# Altium PCB EXP_V121.PcbDoc (part 2 of 4)
Units mm, origin at the board's own origin, x right, y up, seen from the top; angles counter-clockwise.
Board outline 86 x 86 mm, 4 copper layers (Top Layer, Mid-Layer 1, Mid-Layer 2, Bottom Layer), stack 1.584 mm thick; 360 components, 295 nets, 1231 pads, 1192 vias.
Unrouted connection lines stored in the file: 255.
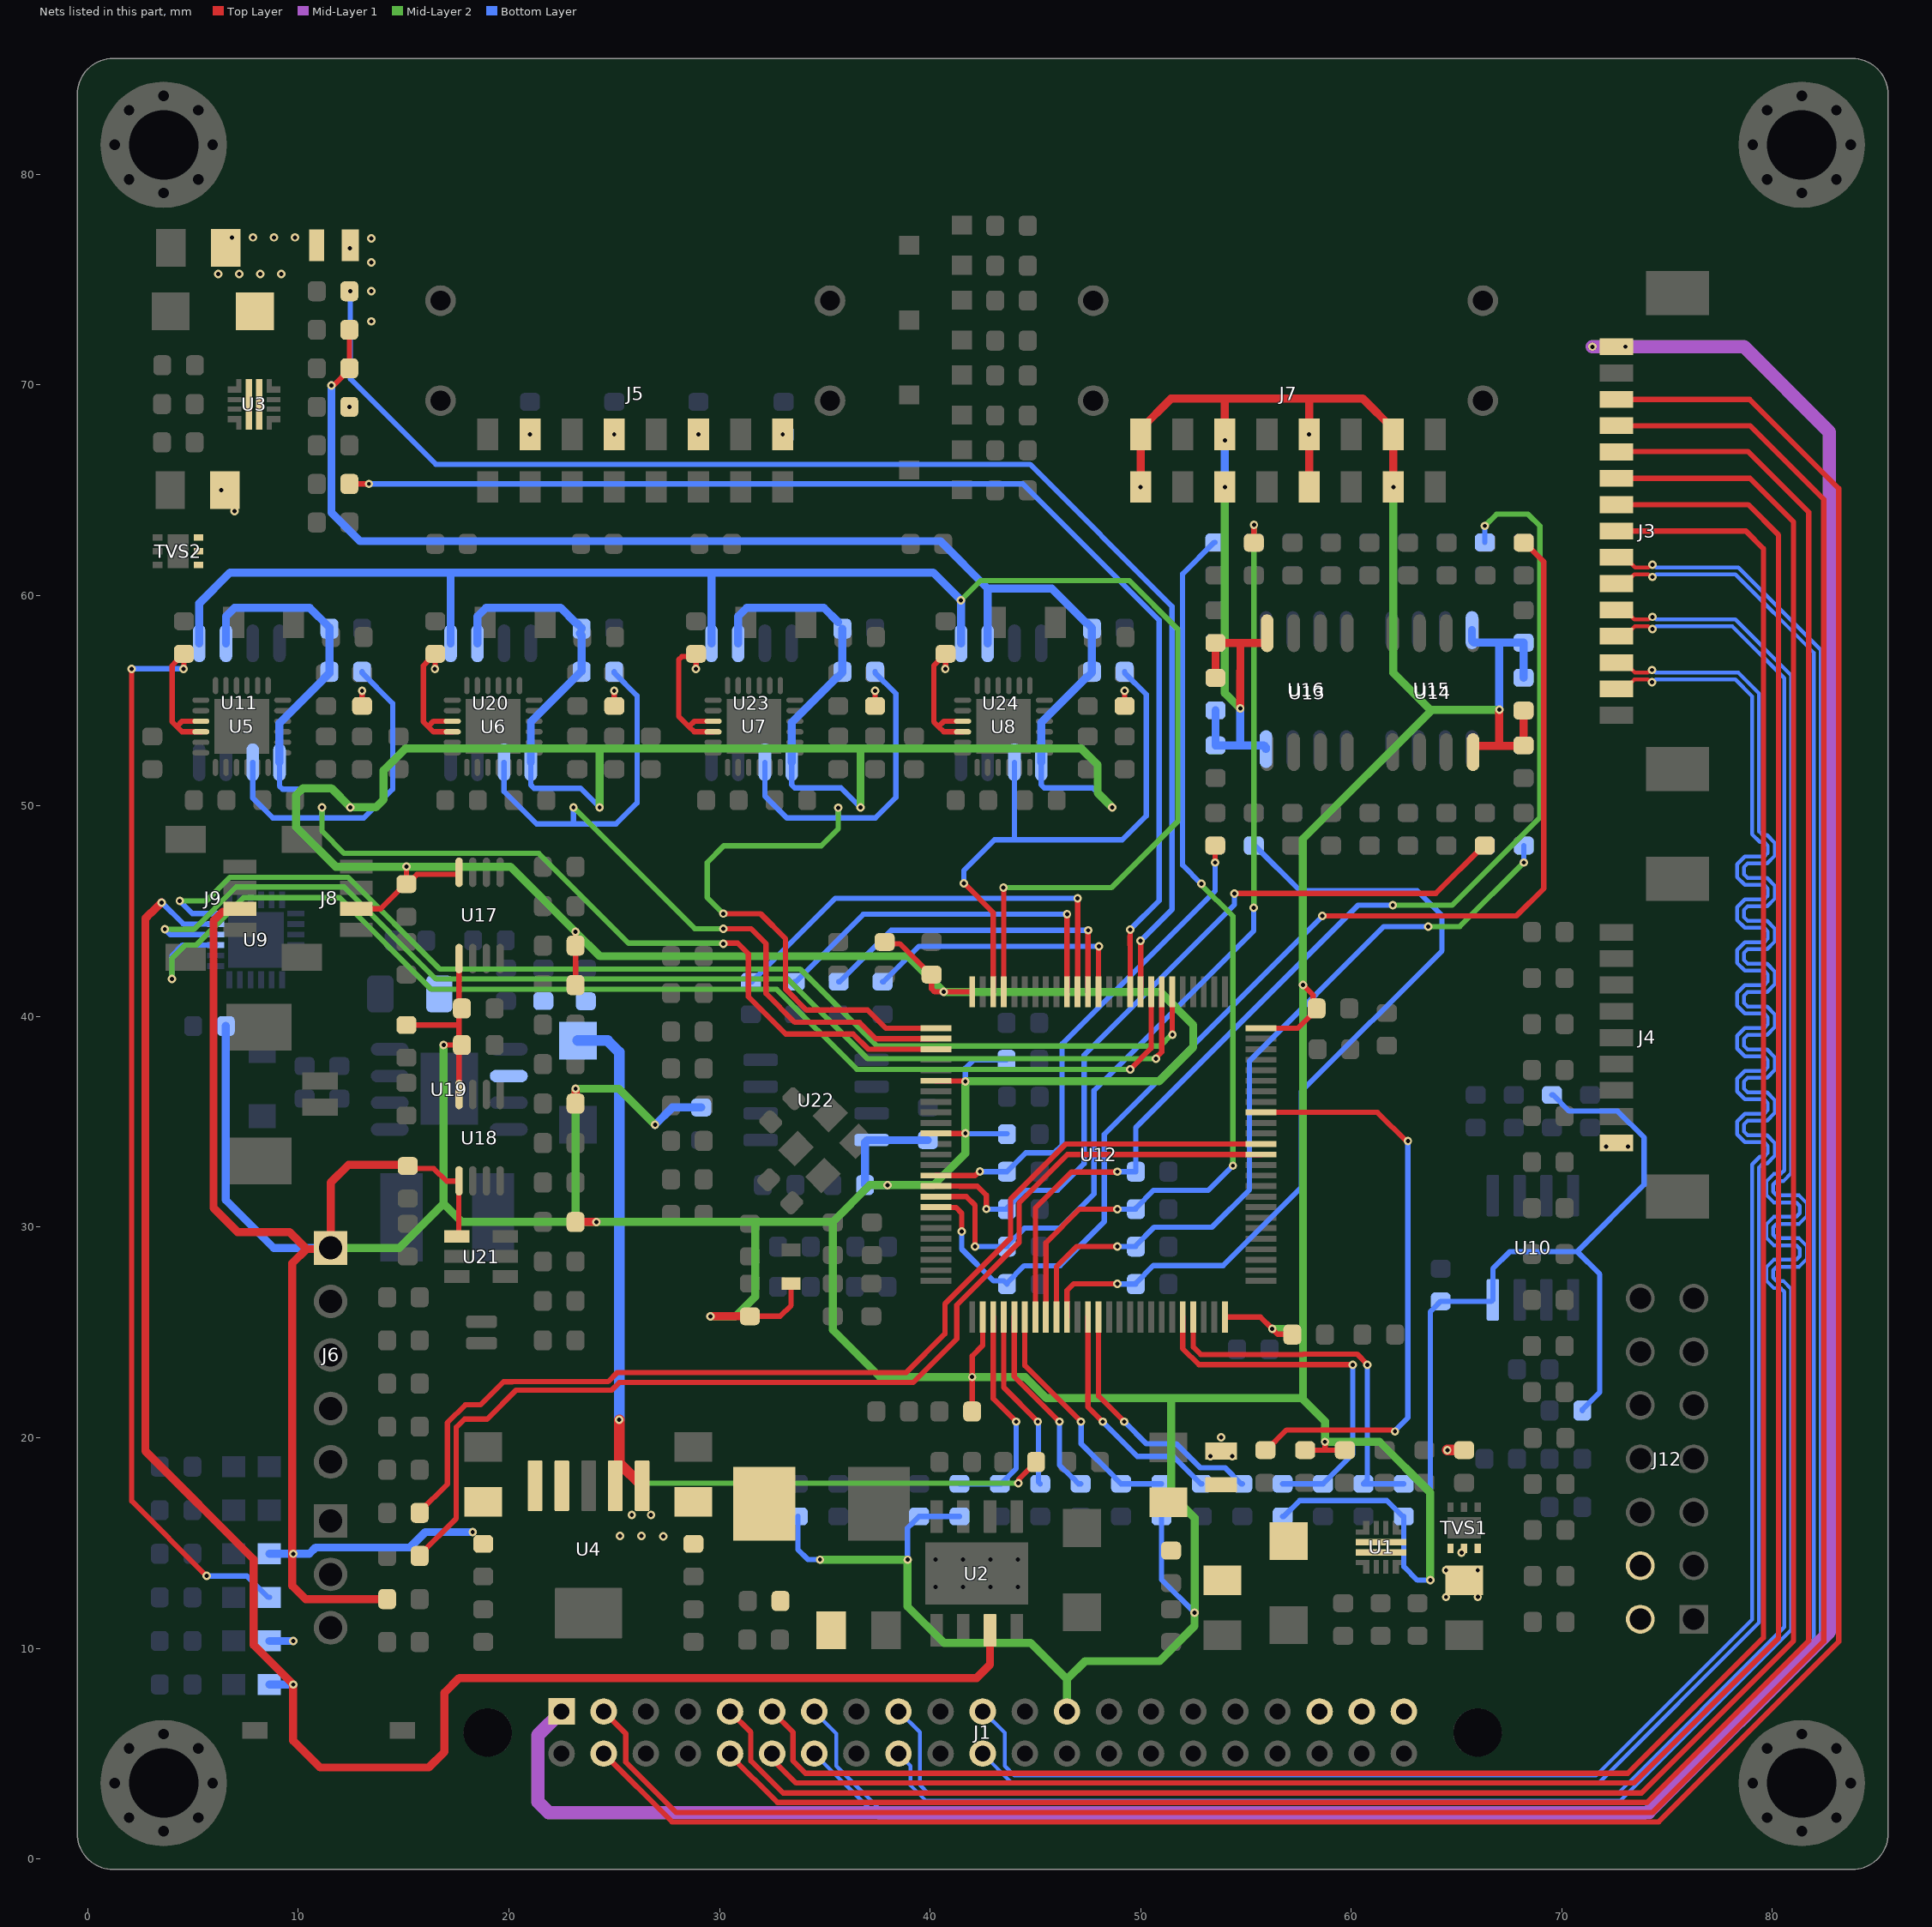
[diagram p4: the nets of this part, all layers, seen from the top]

## Part data
BT1: library part SW2, "Switch button 2 pin"
C1 C2 C8 C9 C12 C13 C17 C18: library part "Cap_Tantalum SMD", "SMD", Chung_Loai=Dán, Don_Vi=Con, Ma_Hang=MH001956, So_Chan=2, Ten_Linh_Kien="Tụ tantalum 477A-470uF 10V SMD7343"
C3 C4 C5 C6 C7 C10 C11 C14 C15 C16 C19 C20 C21 C22 C23 C24 C25 C26 C27 C28 C29 C30 C31 C32 C33 C34 C35 C36 C37 C38 C39 C40 C41 C42 C43 C44 C45 C46 C47 C48 C49 C50 C51 C75 C76 C77 C78 C79 C80 C81 C82 C83 C84 C85 C86 C87 C88 C89 C90 C91 C92 C93 C94 C95 C96 C97 C98 C99 C100 C101 C102 C103 C104 C105 C106 C107 C108 C109 C110 C111 C112 C113 C114 C115 C116 C117 C118 C119 C120 C121 C122 C123 C124 C125 C126 C127 C128 C129 C130 C136 C137 C138 C139 C143 C144 C145 C146 C148 C149 C150 C151 C152 C153 C154 C155 C156: library part Capacitors
D1 D2 D3 D4: "DIODE SCHOTTKY 60V 3A DO214AA"
D5: library part 1N4148-W-7, "DIODE GEN PURP 100V 300MA SOD123", MFR="Diodes Incorporated", MPN=1N4148W-7-F, Solder=SMT
DS1 DS2 DS3 DS4 DS5 DS6: library part "LED SMD"
J1: library part CONN_TH_42, "CONN HEADER VERT 42POS 2MM"
J3: library part CONN_SMD_15, "Conn Shrouded Header (4 Sides) HDR 15 POS 1.25mm Solder RA Side Entry SMD PicoBladeâ„¢ T/R", Package=None, Availability="In Stock", Check_prices=https://www.snapeda.com/parts/532611571/Molex/view-part/?ref=eda, MF=Molex, MP=532611571, Price=None, Purchase-URL=https://pricing.snapeda.com/search/part/532611571/?ref=eda, SnapEDA_Link=https://www.snapeda.com/parts/532611571/Molex/view-part/?ref=snap
J4: library part CONN_SMD_09, "CONN HEADER SMD R/A 9POS 1.25MM"
J5 J7: library part CONN_SMD_16, "CONN HEADER SMD R/A 16POS 2MM"
J6: "WR-PHD 2.54 mm Angled Socket Header", Manufacturer="W¨¹rth Elektronik eiSos GmbH", partNo=613005143121, ComponentLink1 Description=Manufacturer, ComponentLink1URL=http://www.we-online.com, ComponentLink2 Description=Datasheet, ComponentLink2URL=http://katalog.we-online.de/em/datasheet/6130xx143121.pdf, Created by="Karrer Zheng", Created Date="29 March 2013", NoPins=05
J8 J9: "CONN HEADER SMD 4POS 1MM"
J10: library part CONN_SMD_02, "CONN HEADER SMD R/A 2POS 1.25MM"
J11: "WR-PHD 2.54 mm Angled Socket Header", Manufacturer="W¨¹rth Elektronik eiSos GmbH", partNo=613003143121, ComponentLink1 Description=Manufacturer, ComponentLink1URL=http://www.we-online.com, ComponentLink2 Description=Datasheet, ComponentLink2URL=http://katalog.we-online.de/em/datasheet/6130xx143121.pdf, Created by="Karrer Zheng", Created Date="29 March 2013", NoPins=03
J12: library part CONN_TH_14, "CONN SOCKET 14POS 0.1 GOLD PCB"
JP1 JP2 JP3: library part JUMPER
L1: "FIXED IND 22UH 2.5A 170 MOHM SMD"
L2 L3 L4 L5 L7: library part L-SMD-1, Inductance="1.0 μH", Manufacturer="Wurth Elektronik", partNo=78477010, ComponentLink1Description=Manufacturer, ComponentLink1URL=http://www.we-online.de, ComponentLink2Description=Datasheet, ComponentLink2URL=http://katalog.we-online.de/pbs/datasheet/78477010.pdf, Created by="Baojun Chen", Created Date=Nov.2015
L6: library part L-SMD-1, "SRR4828A-820M", Inductance="1.0 μH", Manufacturer="Wurth Elektronik", partNo=78477010, ComponentLink1Description=Manufacturer, ComponentLink1URL=http://www.we-online.de, ComponentLink2Description=Datasheet, ComponentLink2URL=http://katalog.we-online.de/pbs/datasheet/78477010.pdf, Created by="Baojun Chen", Created Date=Nov.2015
Q1 Q2 Q3 Q4: "MOSFET N-CH 30V 5.7A SOT23-3L"
R1 R2 R3 R4 R5 R6 R7 R8 R9 R10 R11 R12 R13 R14 R15 R16 R17 R18 R19 R20 R21 R22 R23 R24 R25 R26 R27 R28 R29 R30 R31 R32 R33 R34 R35 R36 R37 R38 R39 R40 R41 R42 R43 R44 R45 R46 R47 R48 R49 R50 R51 R52 R53 R54 R55 R56 R57 R58 R59 R60 R61 R62 R63 R64 R65 R66 R67 R68 R69 R70 R71 R72 R73 R74 R75 R76 R77 R78 R79 R80 R81 R82 R83 R84 R85 R86 R87 R88 R89 R90 R91 R92 R93 R94 R95 R96 R97 R98 R99 R100 R101 R103 R104 R105 R106 R107 R108 R109 R110 R111 R112 R113 R114 R115 R116 R117 R118 R119 R120 R121 R122 R123 R124 R125 R126 R127 R128 R129 R130 R131 R132 R133 R134 R135 R136 R137 R138 R139 R140 R141 R142 R143 R144 R145 R146 R147 R148 R149 R150 R151 R152 R153 R154 R155 R156 R157 R158 R159 R160 R161 R162 R163 R164 R165 R166 R167 R168: library part "Res SMD", "SMD", Manufacturer="Generic Components", Class=Passive, Published=08/06/2000, Publisher="Altium Hobart Technology Centre"
R102: library part Res-SMD, "RES 0.2 OHM 1% 1W 1206", Manufacturer="Generic Components", Class=Passive, Published=08/06/2000, Publisher="Altium Hobart Technology Centre"
TVS1 TVS2: library part TVS2200, "UNIDIR PRECISION SURGE DIODE"
U2: "IC REG BUCK ADJ 3A 8SOPWR"
U4: "IC REG LINEAR 3.3V 1.5A SOT223-6"
U5 U6 U7 U8: "IC THERMO COOLER DRIVER 24LFCSP", Mfr_Name="Analog Devices Inc", RefDes=RefDes, TYPE=Type
U9: library part ADG1414, "IC SW SPST-NOX8 11.5OHM 24LFCSP"
U10: "IC TRANSCEIVER HALF 1/1 8SOIC", Mfr_Name="Analog Devices Inc", RefDes=RefDes, TYPE=Type
U11 U20 U23 U24: "12 Bit Digital to Analog Converter, P/N: MCP4921-E/SN"
U12: "No Description Available", Mfr_Name=STMicroelectronics, RefDes=RefDes, TYPE=Type
U19: "IC LED DRIVER RGLTR PWM 3A 8SO"
U21: "IC OSC PROG TIMER TSOT23-6"
U22: "FRAM _Ferroelectric RAM_ Memory IC 2Mb _256K x 8_ SPI 40MHz 8-SOP", Package="SO-8 Fujitsu", Digi-Key_Part_Number=865-1286-1-ND, Digi-Key_Purchase_URL=https://www.digikey.com/product-detail/en/fujitsu-electronics-america-inc/MB85RS2MTAPNF-G-BDERE1/865-1286-1-ND/7916252?utm_source=snapeda&utm_medium=aggregator&utm_campaign=symbol, MF="Fujitsu Electronics", MP=MB85RS2MTAPNF-G-BDERE1, SnapEDA_Link=https://www.snapeda.com/parts/MB85RS2MTAPNF-G-BDERE1/Fujitsu%20Electronics%20America%2C%20Inc./view-part/2344795/?ref=snap
X1: library part XT4, "Crystal, 8 MHz, -30 to 85 degC, 3.2 x 2.5 x 0.9 mm SMD"

## Via types
v1: diameter 0.4, hole 0.2, Top Layer to Bottom Layer, tented both sides, 1192 vias

## Nets (pads, with @x,y where several pads share a name; then routed paths per layer and width w, separated by ;. In a path a pad name is that pad's centre, name@x,y a point inside that pad or via, vN(x,y) a via of type N, cw(c..) or ccw(c..) an arc to the next point about the centre after c; other vN are vias at no path point)
5V: C7.2 C8.1 C12.1 C16.2 C17.1 C121.2 C154.2 D4.1 DS2.1 JP2.1 L1.2 R9.1 R12.1 R102.2 TVS2.4 TVS2.5 TVS2.6 U3.5 U4.1 U4.2 U19.6 | length 43.6
  Top Layer w0.254: v1(44.196,17.84) 44.224,17.868 44.224,18.037 44.685,18.498 44.689,18.498 45.033,18.842 R9.1@45.033,18.846
  Top Layer w0.508: v1(25.237,20.853) 25.237,18.804 U4.1@26.323,17.718
  Mid-Layer 2 w0.254: 26.339,17.702 26.477,17.84 v1(44.196,17.84)
  Bottom Layer w0.381: DS2.1@8.623,10.35 v1(9.754,10.35)
  Bottom Layer w0.508: D4.1@23.273,38.86 24.691,38.86 25.237,38.314 v1(25.237,20.853)
  other v1: 27.33,15.316 25.273,15.342 26.289,15.342 25.832,16.332 26.746,16.332 6.97,64.007 6.342,64.995 12.423,68.954 13.465,73.013 13.465,74.445 13.465,75.807 12.444,76.48 13.465,76.95
5V_CAM: J1.1 J3.15 | length 139.8
  Mid-Layer 1 w0.635: J1.1@22.5,7 21.375,5.876 21.375,2.705 21.882,2.198 74.129,2.198 82.708,10.777 82.708,67.761 78.659,71.81 71.457,71.81 v1@71.455,71.809
  other v1: 71.457,71.809 73.025,71.811
5V_TEMP: C13.1 C24.2 C25.2 C36.2 C37.2 C83.2 C84.2 C122.2 C139.2 D3.1 DS3.1 J5.10 J5.12 J5.14 J5.16 JP2.2 R21.1 R22.1 R37.1 R39.1 U3.6 U5.15 U5.16 U6.15 U6.16 U7.15 U7.16 U8.15 U8.16 | length 81.8
  Top Layer w0.254: v1(2.083,56.515) 2.083,16.993 v1(5.639,13.437) ; v1(4.547,56.515) 4.562,56.531 C24.2@4.562,57.225 4.559,57.225 4.214,56.881 4.214,56.877 4,56.663 4,54 4.225,53.775 ; U5.16@5.369,53.525 4.475,53.525 4.225,53.775 ; U5.15@5.369,54.025 4.475,54.025 4.225,53.775 ; R21.1@13.025,54.75 v1(13.025,55.475) ; v1@16.5,56.531 C25.2@16.5,57.225 16.496,57.225 16.152,56.881 16.152,56.877 15.938,56.663 15.938,54 16.163,53.775 ; U6.16@17.307,53.525 16.413,53.525 16.163,53.775 ; U6.15@17.307,54.025 16.413,54.025 16.163,53.775 ; R22.1@25,54.75 v1(25,55.475) ; v1@28.887,56.531 C36.2@28.887,57.225 28.758,57.096 28.21,57.096 28.061,56.947 28.061,54.264 28.55,53.775 ; U7.16@29.694,53.525 28.8,53.525 28.55,53.775 ; U7.15@29.694,54.025 28.8,54.025 28.55,53.775 ; R37.1@37.387,54.75 v1(37.387,55.475) ; v1@40.738,56.531 C37.2@40.738,57.225 40.734,57.225 40.39,56.881 40.39,56.877 40.175,56.663 40.175,54 40.4,53.775 ; U8.16@41.544,53.525 40.65,53.525 40.4,53.775 ; U8.15@41.544,54.025 40.65,54.025 40.4,53.775 ; R39.1@49.238,54.75 v1(49.238,55.475)
  Bottom Layer w0.254: v1(2.083,56.515) v1(4.547,56.515) ; v1(5.639,13.437) 7.555,13.437 8.573,12.419 DS3.1@8.623,12.419
  other v1: 16.484,56.515 28.871,56.515 40.722,56.515 21,67.65 25,67.65 29,67.65 33,67.65 6.198,75.26 7.196,75.26 8.194,75.26 9.192,75.26 6.844,77.001 7.842,77.001 8.841,77.001 9.839,77.001
12V: C2.1 C6.2 C9.1 D1.1 DS1.1 JP1.2 U1.6 U2.7 U9.23 | length 86.1
  Top Layer w0.381: v1(3.505,45.415) 3.5,45.415 3.016,44.931 3,44.931 2.731,44.662 2.731,19.367 7.874,14.224 7.874,10.16 v1(9.754,8.28) 9.754,5.608 11.025,4.337 16.19,4.337 16.94,5.087 16.94,7.89 17.642,8.591 42.214,8.591 42.847,9.225 U2.7@42.847,10.858
  Bottom Layer w0.254: v1(3.505,45.415) 4.525,44.395 U9.23@6.075,44.395
  Bottom Layer w0.381: DS1.1@8.623,8.28 v1(9.754,8.28)
12V_EXP: C1.1 J1.19 J1.20 J1.21 J4.1 J12.02 J12.04 JP1.1 R2.1 TVS1.4 TVS1.5 TVS1.6 U1.5 | length 0.8
  Top Layer w0.254: v1(64.567,19.406) v1@64.57,19.409
  Top Layer w0.508: v1@64.57,19.409 R2.1@65.364,19.409
  other v1: 64.503,12.434 66.012,12.436 64.502,13.7 66.01,13.699 65.237,14.548 53.313,19.118 54.354,19.118 53.821,20.02 72.111,33.826 73.15,33.824
+3.3: C18.1 C19.2 C47.2 C48.2 C49.2 C50.2 C51.2 C77.2 C85.2 C86.2 C93.2 C94.2 C101.2 C102.2 C109.2 C110.2 C117.2 C118.2 C126.2 C127.2 C128.2 C136.2 C137.2 C138.2 C143.2 C155.2 DS4.1 J1.13 J6.1 J7.1 J7.3 J7.5 J7.7 J7.9 J7.11 J7.13 J7.15 J8.2 J9.2 L7.1 R3.1 R14.1 R38.1 R40.1 R41.1 R42.1 R43.1 R44.1 R90.1 R91.1 R92.1 R93.1 R99.1 R100.1 R110.1 R135.1 R139.1 R140.1 R149.1 R153.2 R155.1 R156.1 R163.1 R164.1 R165.1 R166.1 R168.1 U4.4 U4.5 U10.8 U11.1 U11.6 U12.6 U12.11 U12.27 U12.50 U12.75 U12.100 U13.8 U14.8 U15.8 U16.8 U17.1 U17.8 U18.1 U18.8 U20.1 U20.6 U21.1 U22.8 U23.1 U23.6 U24.1 U24.6 | length 687.7
  Top Layer w0.254: v1(11.567,69.975) 11.594,70.003 11.699,70.003 12.384,70.688 12.423,70.688 R149.1@12.423,70.784 R14.1@12.423,72.589 ; J8.2@12.748,45.118 13.906,45.118 15.081,46.293 C117.2@15.131,46.293 ; C118.2@15.131,39.599 17.549,39.599 ; v1(15.131,47.118) C117.2@15.131,46.293 ; C143.2@15.194,32.906 15.317,32.783 16.432,32.783 17.033,32.182 U18.1@17.613,32.182 ; v1(16.896,38.653) 16.9,38.649 R91.1@17.631,38.649 ; U21.1@17.532,29.559 17.613,29.64 U18.1@17.613,32.182 ; 17.629,39.547 17.629,40.248 R90.1@17.767,40.386 ; U18.1@17.631,32.2 U18.1@17.613,32.182 ; U18.8@17.631,36.3 R91.1@17.631,38.649 ; 17.631,39.518 R91.1@17.631,38.649 ; R90.1@17.631,40.386 U17.1@17.631,42.752 ; U17.8@17.631,46.852 17.586,46.808 17.586,46.75 15.628,46.75 15.171,46.293 C117.2@15.131,46.293 ; R91.1@17.767,38.649 R91.1@17.631,38.649 ; R93.1@23.163,41.493 R92.1@23.163,43.367 v1(23.163,44.021) ; C77.2@31.445,25.767 32.88,25.767 33.401,26.288 L7.1@33.401,27.317 ; R38.1@37.847,43.545 37.931,43.461 38.554,43.461 40.02,41.995 C128.2@40.07,41.995 40.07,41.32 40.219,41.172 v1(40.647,41.172) U12.100@42,41.172 ; U12.11@40.278,34.45 v1(41.675,34.45) ; U12.6@40.278,36.95 40.291,36.938 41.662,36.938 v1(41.675,36.925) ; C138.2@41.998,21.25 v1(41.998,22.883) 41.998,23.887 42.5,24.388 U12.27@42.5,25.728 ; U12.50@54,25.728 55.691,25.728 56.248,25.171 v1(56.253,25.171) 56.507,24.918 C136.2@57.004,24.918 ; U12.75@55.722,39.45 57.47,39.45 58.356,40.336 58.187,40.505 58.187,41.023 v1(57.705,41.504) ; R3.1@57.814,19.409 58.758,19.409 ; v1(58.758,19.806) 58.758,19.409 ; R135.1@59.701,19.409 58.758,19.409
  Top Layer w0.381: J9.2@7.221,45.118 7.082,44.978 6.401,44.978 5.969,44.546 5.969,30.912 7.112,29.769 9.575,29.769 10.383,28.96 ; 13.445,32.963 13.442,32.96 13.434,32.96 13.431,32.964 12.383,32.964 11.532,32.113 J6.1@11.532,29.012 11.48,28.96 10.383,28.96 ; 13.452,32.956 15.144,32.956 C143.2@15.194,32.906 ; R110.1@14.211,12.335 10.345,12.335 9.709,12.97 9.709,28.286 10.383,28.96 ; R99.1@23.163,30.246 v1(24.157,30.246) ; R100.1@23.163,35.869 v1(23.165,36.571) v1(23.165,36.571) ; v1(29.566,25.767) C77.2@31.445,25.767 ; v1(50,65.15) J7.9@50,67.65 50,67.9 51.442,69.342 54,69.342 ; C86.2@53.554,56.083 C85.2@53.554,57.74 54.73,57.74 ; J7.11@54,67.65 54,69.342 ; v1(54.731,54.632) 54.734,54.634 54.734,56.411 54.737,56.413 54.737,57.733 54.73,57.74 ; U13.8@56.007,58.206 56.007,57.841 55.906,57.74 54.73,57.74 ; J7.5@58,65.15 v1(58,67.65) 58,69.342 ; v1(62,65.15) J7.15@62,67.65 62,67.9 60.558,69.342 58,69.342 ; U14.8@65.786,52.557 65.786,52.753 65.887,52.855 67.025,52.855 ; v1(67.034,54.569) 67.034,53.714 67.025,53.705 67.025,52.855 ; C93.2@68.186,54.533 C94.2@68.186,52.877 68.164,52.855 67.025,52.855 ; 54,69.342 58,69.342
  Mid-Layer 2 w0.381: J6.1@11.532,29.012 14.788,29.012 16.896,31.12 ; v1(16.896,38.653) 16.896,31.12 ; v1(24.308,49.936) 24.308,52.717 24.3,52.725 ; v1@26.932,34.862 25.223,36.571 v1(23.165,36.571) 23.165,30.296 23.114,30.246 ; v1(29.566,25.767) 30.771,25.767 31.699,26.695 31.699,30.246 ; v1(34.773,14.208) v1(38.931,14.208) 38.931,11.987 40.656,10.262 44.768,10.262 46.5,8.529 ; v1(36.694,49.936) 36.694,52.717 36.687,52.725 ; v1(41.675,36.925) v1(41.675,34.45) 41.675,33.502 40.172,31.999 v1(37.975,31.999) 37.135,31.999 35.382,30.246 ; v1@41.68,36.925 50.874,36.925 52.5,38.551 52.5,39.6 50.929,41.172 v1(40.647,41.172) 38.954,42.864 24.32,42.864 v1(23.163,44.021) 20.066,47.118 v1(15.131,47.118) 11.77,47.118 9.894,48.994 9.894,50.51 10.227,50.844 11.564,50.844 12.466,49.942 12.471,49.942 v1(12.471,49.936) 13.674,49.936 14.05,50.312 14.05,51.694 15.081,52.725 24.3,52.725 ; J1.13@46.5,7 46.5,8.529 ; v1(48.647,49.936) 47.957,50.626 47.957,51.956 47.188,52.725 36.687,52.725 ; v1(54,65.15) 54,55.363 v1(54.731,54.632) ; v1(56.253,25.171) 57.709,25.171 ; v1(57.705,41.504) 57.705,48.437 63.755,54.487 63.755,54.569 ; v1@57.709,41.496 57.709,25.171 ; v1(62,65.15) 62,56.324 63.755,54.569 ; v1(63.754,13.233) 63.754,17.397 61.345,19.806 v1(58.758,19.806) 58.758,20.771 57.645,21.883 ; v1(67.034,54.569) 63.755,54.569 ; 16.896,31.12 17.771,30.246 23.114,30.246 ; 23.114,30.246 v1(24.157,30.246) 31.699,30.246 ; 24.3,52.725 36.687,52.725 ; 31.699,30.246 35.382,30.246 ; 35.382,30.246 35.382,25.121 37.62,22.883 v1(41.998,22.883) 44.517,22.883 45.517,21.883 51.456,21.883 ; 46.5,8.529 47.362,9.392 50.895,9.392 52.561,11.057 52.561,11.688 v1(52.565,11.691) 52.565,16.193 51.456,17.302 51.456,21.883 ; 51.456,21.883 57.645,21.883 ; 57.645,21.883 57.709,21.947 57.709,25.171
  Bottom Layer w0.254: U11.1@9.102,52.075 9.102,50.949 9.251,50.8 11.608,50.8 v1(12.471,49.936) ; U20.1@21.04,52.075 21.04,50.991 21.189,50.842 23.402,50.842 v1(24.308,49.936) ; U23.1@33.427,52.075 33.427,51.008 33.576,50.859 35.772,50.859 v1(36.694,49.936) ; R41.1@33.723,16.262 33.723,14.69 34.192,14.221 34.76,14.221 v1(34.773,14.208) ; v1(38.931,14.208) 38.931,15.715 39.183,15.967 39.183,15.971 39.474,16.262 R44.1@39.478,16.262 R155.1@41.397,16.262 ; v1(41.675,34.45) 41.693,34.432 C127.2@43.652,34.432 ; v1(41.675,36.925) 41.675,37.546 42.075,37.946 C137.2@43.632,37.946 ; U24.1@45.278,52.075 45.278,51.008 45.426,50.859 47.724,50.859 v1(48.647,49.936) ; R40.1@50.989,16.262 50.989,13.267 v1(52.565,11.691) ; R42.1@56.744,16.262 56.794,16.262 57.55,17.018 61.694,17.018 62.45,16.262 R43.1@62.5,16.262 62.5,13.878 63.144,13.233 v1(63.754,13.233) 63.754,25.979 63.955,26.18 63.955,26.184 64.246,26.475 C47.2@64.25,26.475 66.655,26.475 U10.8@66.73,26.55 66.73,28.025 67.54,28.835 70.733,28.835 ; R168.1@69.534,36.279 69.585,36.279 70.351,35.513 72.656,35.513 73.914,34.254 73.914,32.016 70.733,28.835 ; R156.1@70.977,21.29 70.977,21.34 71.806,22.168 71.806,27.762 70.733,28.835
  Bottom Layer w0.381: R153.2@6.553,39.55 6.553,31.293 8.834,29.012 J6.1@11.532,29.012 ; U11.6@6.562,57.725 6.562,59.005 6.968,59.411 10.535,59.411 11.475,58.47 C48.2@11.475,58.419 R163.1@11.475,56.376 11.475,56.306 11.467,56.306 11.241,56.08 11.241,56.072 9.102,53.933 U11.1@9.102,52.075 ; DS4.1@8.623,14.488 v1(9.754,14.488) 9.757,14.492 10.524,14.492 10.82,14.787 15.295,14.787 16.027,15.519 v1(18.278,15.519) ; v1(11.567,69.975) 11.567,63.933 12.925,62.575 40.493,62.575 42.738,60.33 ; U20.6@18.5,57.725 18.5,59.005 18.906,59.411 22.458,59.411 23.179,58.69 23.217,58.69 23.45,58.457 C49.2@23.45,58.419 ; U20.1@21.04,52.075 21.04,53.992 23.444,56.396 23.444,58.114 C49.2@23.361,58.197 ; v1(26.936,34.858) 27.76,35.682 R139.1@29.13,35.682 ; U23.6@30.887,57.725 30.887,59.005 31.293,59.411 34.952,59.411 C50.2@35.636,58.726 ; U23.1@33.427,52.075 33.427,53.966 35.566,56.105 35.604,56.105 35.837,56.338 R165.1@35.837,56.376 C50.2@35.837,58.419 ; v1(37.975,31.999) C155.2@36.911,31.999 36.911,34.028 37.016,34.132 U22.8@37.222,34.132 R140.1@39.896,34.132 ; U24.6@42.738,57.725 42.738,60.33 ; U24.1@45.278,52.075 45.278,53.966 47.417,56.105 47.455,56.105 47.688,56.338 R166.1@47.688,56.376 47.688,56.96 C51.2@47.688,58.419 47.688,58.457 47.455,58.69 47.417,58.69 45.776,60.33 42.738,60.33 ; C109.2@53.554,54.543 C110.2@53.554,52.882 54.731,52.882 ; v1(54,65.15) v1(54,67.359) ; v1(54.731,54.632) 54.731,52.882 ; U16.8@55.954,52.703 55.954,52.78 55.853,52.882 54.731,52.882 ; U15.8@65.733,58.353 65.733,57.856 65.835,57.755 67.034,57.755 ; v1(67.034,54.569) 67.034,57.755 ; C102.2@68.186,56.093 C101.2@68.186,57.755 67.034,57.755
ADC_TEMP1: C92.2 R66.2 U12.15 | length 23.8
  Top Layer w0.254: U12.15@40.278,32.45 42.139,32.45 42.328,32.639 v1(42.367,32.639) ; v1(53.542,47.317) R66.2@53.542,48.12
  Bottom Layer w0.254: v1(42.367,32.639) 42.372,32.634 C92.2@43.652,32.634 43.652,32.638 43.996,32.982 44,32.982 44.546,33.528 45.898,33.528 46.272,33.902 46.272,38.703 53.542,45.973 v1(53.542,47.317)
ADC_TEMP2: C98.2 R72.2 U12.16 | length 37.2
  Top Layer w0.254: U12.16@40.278,31.95 41.396,31.95 41.401,31.945 42.248,31.945 42.672,31.521 v1(42.672,30.861) ; 54.66,45.847 64.021,45.847 66.294,48.12 R72.2@66.344,48.12
  Bottom Layer w0.254: v1(42.672,30.861) 42.678,30.855 C98.2@43.652,30.855 43.652,30.905 44.497,31.75 46.05,31.75 47.315,33.015 47.315,38.171 54.458,45.314 v1(54.458,45.844)
ADC_TEMP3: C91.2 R67.2 U12.17 | length 46.5
  Top Layer w0.254: U12.17@40.278,31.45 41.725,31.45 42.139,31.036 v1(42.139,29.076) ; R67.2@55.374,62.497 55.378,62.501 55.378,63.351 v1(55.382,63.355)
  Mid-Layer 2 w0.254: v1(55.372,45.161) 55.377,45.166 55.377,63.35 v1(55.382,63.355)
  Bottom Layer w0.254: v1(42.139,29.076) C91.2@43.652,29.076 43.652,29.126 44.479,29.953 46.158,29.953 47.781,31.576 47.781,36.489 55.372,44.08 v1(55.372,45.161)
ADC_TEMP4: C100.2 R73.2 U12.18 | length 58.5
  Top Layer w0.254: U12.18@40.278,30.95 40.291,30.937 41.224,30.937 41.504,30.658 v1(41.504,29.794) ; v1(58.623,44.78) 67.848,44.78 69.147,46.079 69.147,61.599 68.248,62.497 R73.2@68.198,62.497
  Bottom Layer w0.254: v1(41.504,29.794) 41.504,28.958 43.005,27.457 43.492,27.457 C100.2@43.652,27.297 43.652,27.347 44.474,28.169 46.177,28.169 48.271,30.263 48.271,34.402 58.623,44.754 v1(58.623,44.78)
ADC_TEMP5: C106.2 R78.2 U12.32 | length 55.8
  Top Layer w0.254: U12.32@45,25.728 45,30.903 46.711,32.614 48.87,32.614 48.89,32.634 v1(48.892,32.634)
  Mid-Layer 2 w0.254: v1(61.976,45.288) 64.795,45.288 68.961,49.454 68.961,63.297 68.402,63.856 66.9,63.856 v1(66.345,63.3)
  Bottom Layer w0.254: v1(48.892,32.634) C106.2@49.772,32.634 49.772,34.743 60.318,45.288 v1(61.976,45.288) ; R78.2@66.345,62.517 v1(66.345,63.3)
ADC_TEMP6: C114.2 R84.2 U12.33 | length 45.2
  Top Layer w0.254: U12.33@45.5,25.728 45.5,29.262 47.093,30.855 v1(48.892,30.855)
  Mid-Layer 2 w0.254: v1(52.883,46.304) 52.883,46.265 54.381,44.766 v1(54.381,32.918)
  Bottom Layer w0.254: v1(48.892,30.855) C114.2@49.772,30.855 49.772,30.905 50.617,31.75 53.213,31.75 v1(54.381,32.918) ; v1(52.883,46.304) 51.994,47.193 51.994,61.018 53.492,62.517 R84.2@53.542,62.517
ADC_TEMP7: C108.2 R80.2 U12.34 | length 36.9
  Top Layer w0.254: U12.34@46,25.728 46,28.118 46.965,29.083 v1(48.89,29.083)
  Mid-Layer 2 w0.254: v1@63.663,44.275 65.157,44.275 v1(68.198,47.317)
  Bottom Layer w0.254: v1(48.89,29.083) 48.894,29.08 49.769,29.08 C108.2@49.772,29.076 ; C108.2@49.772,29.126 50.644,29.998 53.391,29.998 55.169,31.775 55.169,37.897 61.547,44.275 v1(63.652,44.275) ; v1@68.119,47.317 68.198,47.397 R80.2@68.198,48.12
ADC_TEMP8: C116.2 R85.2 U12.35 | length 40.5
  Top Layer w0.254: U12.35@46.5,25.728 46.5,26.993 46.812,27.305 v1(48.892,27.305)
  Bottom Layer w0.254: v1(48.892,27.305) 48.896,27.301 49.768,27.301 C116.2@49.772,27.297 49.772,27.347 50.602,28.177 53.919,28.177 57.625,31.883 57.625,36.439 64.313,43.127 64.313,44.798 63.137,45.974 57.57,45.974 55.424,48.12 R85.2@55.374,48.12
ADG_CS: U9.21 U12.83 | length 58.5
  Top Layer w0.254: v1@49.507,37.501 50.498,38.492 U12.83@50.498,41.164
  Mid-Layer 2 w0.254: v1(3.992,41.792) 3.992,42.755 4.631,43.395 5.146,43.395 7.395,45.644 11.963,45.644 16.313,41.294 32.722,41.294 36.522,37.494 v1(49.5,37.494)
  Bottom Layer w0.254: v1(3.992,41.792) 3.992,42.885 4.502,43.395 U9.21@6.075,43.395
ADG_IOMOSI: U9.24 U12.81 | length 55.1
  Top Layer w0.254: v1@51.5,39.153 U12.81@51.5,41.172
  Mid-Layer 2 w0.254: v1(4.369,45.491) 5.623,45.491 6.747,46.616 12.359,46.616 16.718,42.256 33.829,42.256 37.486,38.6 50.93,38.6 51.472,39.141 v1(51.511,39.141)
  Bottom Layer w0.254: v1(4.369,45.491) 4.965,44.895 U9.24@6.075,44.895
ADG_IOSCK: U9.22 U12.82 | length 57.1
  Top Layer w0.254: v1(50.724,38.004) 50.724,38.043 51.001,38.32 U12.82@51.001,41.171
  Mid-Layer 2 w0.254: v1(3.658,44.145) 5.037,44.145 7.043,46.152 12.167,46.152 16.536,41.782 33.248,41.782 37.03,38 50.721,38 v1(50.724,38.004)
  Bottom Layer w0.254: v1(3.658,44.145) 3.908,43.895 U9.22@6.075,43.895
CAM_CK_N: J1.7 J3.6 | length 111.6
  Top Layer w0.18: J3.6@72.6,60.56 73,60.56 73.44,61 73.739,61 74.12,61 74.244,60.876 v1(74.303,60.876)
  Bottom Layer w0.18: J1.7@34.5,7 35.551,5.949 35.551,4.417 37.756,2.212 73.756,2.212 81.966,10.422 81.966,57.284 78.25,61 74.487,61
CAM_CK_P: J1.28 J3.7 | length 111.1
  Top Layer w0.18: J3.7@72.6,61.81 73,61.81 73.48,61.33 73.876,61.33 74.12,61.33 74.244,61.454 v1(74.303,61.454)
  Bottom Layer w0.18: J1.28@34.5,5 34.501,5 37.62,1.882 73.893,1.882 82.296,10.285 82.296,57.421 78.387,61.33 74.487,61.33
CAM_D0_N: J1.11 J3.2 | length 109.3
  Top Layer w0.18: J3.2@72.6,55.56 73,55.56 73.448,56.008 74.096,56.008 74.222,55.882 v1(74.282,55.882)
  Bottom Layer w0.18: J1.11@42.5,7 42.536,7 43.546,5.99 43.546,4.408 44.002,3.952 71.632,3.952 79.045,11.365 79.045,31.808 79.045,32.982 79.41,33.348 79.613,33.348 79.784,33.52 79.784,33.864 79.613,34.036 78.692,34.036 78.327,34.401 78.327,35.018 78.692,35.384 79.613,35.384 79.784,35.556 79.784,35.9 79.613,36.072 78.692,36.072 78.327,36.437 78.327,37.054 78.692,37.42 79.613,37.42 79.784,37.592 79.784,37.936 79.613,38.108 78.692,38.108 78.327,38.473 78.327,39.09 78.692,39.456 79.613,39.456 79.784,39.628 79.784,39.972 79.613,40.144 78.692,40.144 78.327,40.509 78.327,41.126 78.692,41.492 79.613,41.492 79.784,41.664 79.784,42.008 79.613,42.18 78.692,42.18 78.327,42.545 78.327,43.162 78.692,43.528 79.613,43.528 79.784,43.7 79.784,44.044 79.613,44.216 78.692,44.216 78.327,44.581 78.327,45.198 78.692,45.564 79.613,45.564 79.784,45.736 79.784,46.08 79.613,46.252 78.692,46.252 78.327,46.617 78.327,47.234 78.692,47.6 79.613,47.6 79.784,47.772 79.784,48.116 79.613,48.288 79.41,48.288 79.045,48.653 79.045,48.976 79.045,55.205 78.244,56.006 74.465,56.006
CAM_D0_P: J1.32 J3.3 | length 108.8
  Top Layer w0.18: J3.3@72.6,56.81 73,56.81 73.472,56.338 74.101,56.338 74.222,56.46 v1(74.282,56.46)
  Bottom Layer w0.18: J1.32@42.5,5 42.5,4.987 43.865,3.622 71.769,3.622 79.375,11.229 79.375,31.808 79.375,32.846 79.547,33.018 79.749,33.018 80.114,33.383 80.114,34 79.749,34.366 78.829,34.366 78.657,34.538 78.657,34.882 78.829,35.054 79.749,35.054 80.114,35.419 80.114,36.036 79.749,36.402 78.829,36.402 78.657,36.574 78.657,36.918 78.829,37.09 79.749,37.09 80.114,37.455 80.114,38.072 79.749,38.438 78.829,38.438 78.657,38.61 78.657,38.954 78.829,39.126 79.749,39.126 80.114,39.491 80.114,40.108 79.749,40.474 78.829,40.474 78.657,40.646 78.657,40.99 78.829,41.162 79.749,41.162 80.114,41.527 80.114,42.144 79.749,42.51 78.829,42.51 78.657,42.682 78.657,43.026 78.829,43.198 79.749,43.198 80.114,43.563 80.114,44.18 79.749,44.546 78.829,44.546 78.657,44.718 78.657,45.062 78.829,45.234 79.749,45.234 80.114,45.599 80.114,46.216 79.749,46.582 78.829,46.582 78.657,46.754 78.657,47.098 78.829,47.27 79.749,47.27 80.114,47.635 80.114,48.252 79.749,48.618 79.547,48.618 79.375,48.79 79.375,48.976 79.375,55.342 78.381,56.336 74.465,56.336
CAM_D1_N: J1.9 J3.4 | length 108.8
  Top Layer w0.18: J3.4@72.6,58.06 73,58.06 73.473,58.533 74.114,58.533 74.244,58.403 v1(74.303,58.403)
  Bottom Layer w0.18: J1.9@38.5,7 38.533,7 39.517,6.016 39.517,3.51 39.929,3.099 72.659,3.099 80.569,11.009 80.569,26.745 80.569,26.932 80.397,27.104 80.07,27.104 79.705,27.469 79.705,28.087 80.07,28.452 81.134,28.452 81.306,28.624 81.306,28.968 81.134,29.14 80.07,29.14 79.705,29.505 79.705,30.123 80.07,30.488 81.134,30.488 81.306,30.66 81.306,31.004 81.134,31.176 80.07,31.176 79.705,31.541 79.705,32.159 80.07,32.524 80.397,32.524 80.569,32.696 80.569,33.334 80.569,56.068 78.109,58.527 74.487,58.527
CAM_D1_P: J1.30 J3.5 | length 108.3
  Top Layer w0.18: J3.5@72.6,59.31 73,59.31 73.447,58.863 74.126,58.863 74.244,58.981 v1(74.303,58.981)
  Bottom Layer w0.18: J1.30@38.5,5 38.5,4.991 39.076,4.416 39.076,3.485 39.792,2.769 72.795,2.769 80.899,10.872 80.899,26.745 80.899,27.069 80.534,27.434 80.207,27.434 80.035,27.606 80.035,27.95 80.207,28.122 81.271,28.122 81.636,28.487 81.636,29.105 81.271,29.47 80.207,29.47 80.035,29.642 80.035,29.986 80.207,30.158 81.271,30.158 81.636,30.523 81.636,31.141 81.271,31.506 80.207,31.506 80.035,31.678 80.035,32.022 80.207,32.194 80.534,32.194 80.899,32.559 80.899,33.334 80.899,56.204 78.246,58.857 74.487,58.857
CAM_IO0: J1.27 J3.9 | length 112.1
  Top Layer w0.254: J1.27@32.5,5 32.5,4.742 33.639,3.603 73.423,3.603 80.295,10.474 80.295,62.865 78.849,64.31 J3.9@72.6,64.31
CAM_IO1: J1.6 J3.8 | length 110.8
  Top Layer w0.254: J1.6@32.5,7 33.485,6.015 33.485,4.664 34.085,4.064 73.14,4.064 79.579,10.503 79.579,62.227 78.746,63.06 J3.8@72.6,63.06
CAM_SCL: J1.5 J3.10 | length 118.3
  Top Layer w0.254: J1.5@30.5,7 31.489,6.011 31.489,4.659 33.018,3.131 73.786,3.131 81.01,10.354 81.01,63.49 78.94,65.56 J3.10@72.6,65.56
CAM_SDA: J1.26 J3.11 | length 119.3
  Top Layer w0.254: J1.26@30.5,5 30.5,4.928 32.748,2.68 74.044,2.68 81.725,10.361 81.725,63.953 78.841,66.837 72.627,66.837 J3.11@72.6,66.81
CM4_SCL: J1.2 J3.12 | length 129.6
  Top Layer w0.254: J1.2@24.5,7 25.553,5.947 25.553,4.597 27.951,2.199 74.308,2.199 82.441,10.332 82.441,64.559 78.94,68.06 J3.12@72.6,68.06
CM4_SDA: J1.23 J3.13 | length 130.6
  Top Layer w0.254: J1.23@24.5,5 27.743,1.757 74.598,1.757 83.156,10.315 83.156,65.08 78.926,69.31 J3.13@72.6,69.31
CONS_UART6_RX: R113.1 U12.64 | length 50.9
  Top Layer w0.254: R113.1@15.761,16.43 15.761,16.48 17.075,17.795 17.075,20.714 17.927,21.565 18.653,21.565 19.74,22.653 20.159,22.653 20.169,22.663 24.708,22.663 25.138,23.093 38.863,23.093 40.705,24.934 40.705,26.351 43.823,29.469 43.823,31.323 46.45,33.95 U12.64@55.722,33.95
CONS_UART6_TX: R114.1 U12.63 | length 52.5
  Top Layer w0.254: R114.1@15.761,14.383 15.761,14.433 17.5,16.172 17.5,20.496 17.889,20.885 18.962,20.885 20.336,22.259 24.875,22.259 25.237,22.621 39.194,22.621 41.267,24.693 41.267,26.303 44.227,29.263 44.227,31.155 46.522,33.45 U12.63@55.722,33.45
DAC_nCS_1: R163.2 U11.2 U12.3 | length 51.8
  Top Layer w0.254: v1(30.175,43.459) 30.203,43.487 30.858,43.487 31.369,42.977 31.369,40.945 33.147,39.167 36.347,39.167 37.064,38.45 U12.3@40.278,38.45
  Mid-Layer 2 w0.254: v1(11.125,49.936) 11.125,48.793 12.167,47.752 21.412,47.752 25.679,43.485 30.15,43.485 v1(30.175,43.459)
  Bottom Layer w0.254: U11.2@7.832,52.075 7.832,50.381 8.782,49.431 11.114,49.431 ; v1(11.125,49.936) 11.125,49.442 11.114,49.431 ; R163.2@13.025,56.376 13.025,56.326 14.478,54.873 14.478,50.8 13.109,49.431 11.114,49.431
DAC_nCS_2: R164.2 U12.2 U20.2 | length 39.4
  Top Layer w0.254: v1@30.175,44.171 31.496,44.171 32.205,43.461 32.205,41.099 33.579,39.726 36.652,39.726 37.428,38.95 U12.2@40.278,38.95
  Mid-Layer 2 w0.254: v1@23.064,49.935 28.825,44.175 v1(30.175,44.175)
  Bottom Layer w0.254: U20.2@19.77,52.075 19.77,50.689 21.31,49.149 23.063,49.149 ; v1(23.063,49.936) 23.063,49.149 ; R164.2@25,56.376 25,56.326 26.086,55.24 26.086,50.146 25.089,49.149 23.063,49.149
DAC_nCS_3: R165.2 U12.1 U23.2 | length 39.9
  Top Layer w0.254: v1@30.168,44.882 31.953,44.882 33.138,43.697 33.138,41.299 34.127,40.31 37.033,40.31 37.893,39.45 U12.1@40.278,39.45
  Mid-Layer 2 w0.254: v1(30.175,44.89) 29.413,45.652 29.413,47.32 30.201,48.108 34.835,48.108 35.636,48.909 v1(35.636,49.919)
  Bottom Layer w0.254: U23.2@32.157,52.075 32.157,50.469 33.195,49.431 35.636,49.431 ; v1(35.636,49.919) 35.636,49.431 ; R165.2@37.387,56.376 37.387,56.326 38.379,55.334 38.379,50.404 37.407,49.431 35.636,49.431
DAC_nCS_4: R166.2 U12.98 U24.2 | length 27
  Top Layer w0.254: v1(41.606,46.33) 43,44.936 U12.98@43,41.172
  Bottom Layer w0.254: v1(41.606,46.33) 41.606,46.941 43.06,48.395 44.008,48.395 ; U24.2@44.008,52.075 44.008,48.395 ; R166.2@49.238,56.376 49.238,56.326 50.267,55.297 50.267,49.53 49.132,48.395 44.008,48.395
DAC_nLDAC: U11.5 U12.97 U20.5 U23.5 U24.5 | length 83.3
  Top Layer w0.254: v1(43.485,46.123) 43.485,46.076 43.5,46.06 U12.97@43.5,41.172
  Mid-Layer 2 w0.254: v1(41.468,59.772) 42.402,60.706 49.454,60.706 51.765,58.395 51.765,49.276 48.613,46.123 v1(43.485,46.123)
  Bottom Layer w0.381: U11.5@5.292,57.725 5.292,59.623 6.756,61.087 17.23,61.087 ; U20.5@17.23,57.725 17.23,61.087 ; U23.5@29.617,57.725 29.617,61.087 ; U24.5@41.468,57.725 v1(41.468,59.772) 40.153,61.087 29.617,61.087 ; 17.23,61.087 22.513,61.087 22.523,61.077 22.994,61.077 23.004,61.087 29.617,61.087
EF_5_AUX: R15.2 U12.84 | length 66.8
  Top Layer w0.254: R15.2@12.423,74.445 v1(12.467,74.445) ; U12.84@50,40.961 v1(50,43.6)
  Bottom Layer w0.254: v1(12.467,74.445) 12.467,70.283 16.525,66.225 44.742,66.225 51.486,59.481 51.486,45.086 v1(50,43.6)
EF_5_EN: R13.1 U12.85 | length 59.6
  Top Layer w0.254: R13.1@12.423,65.293 12.424,65.295 13.349,65.295 v1(13.351,65.297) ; U12.85@49.5,40.949 49.5,43.386 49.495,43.391 49.495,43.809 49.5,43.814 v1(49.5,44.129)
  Bottom Layer w0.254: v1(13.351,65.297) 44.406,65.297 50.876,58.826 50.876,45.505 v1(49.5,44.129)
EF_12_AUX: R4.2 U12.67 | length 28.1
  Top Layer w0.254: U12.67@55.722,35.45 61.248,35.45 62.664,34.034 v1@62.693,34.034 ; R4.2@55.927,19.409 55.977,19.409 56.935,20.367 61.93,20.367 61.972,20.326 62.05,20.326 v1(62.078,20.298)
  Bottom Layer w0.254: v1(62.078,20.298) 62.078,20.337 62.693,20.952 v1@62.693,34.034
  other v1: 62.693,34.092
EXP_I2C2_SCL: R42.2 R45.1 U12.46 | length 18
  Top Layer w0.254: U12.46@52,25.728 52,24.232 52.766,23.467 v1(60.068,23.467)
  Bottom Layer w0.254: R42.2@56.744,17.812 R45.1@58.663,17.812 ; R45.1@58.667,17.812 59.011,18.156 59.011,18.16 60.068,19.217 v1(60.068,23.467)
EXP_I2C2_SDA: R43.2 R47.2 U12.47 | length 17.7
  Top Layer w0.254: U12.47@52.5,25.728 52.5,24.304 52.851,23.952 57.706,23.952 57.725,23.972 60.277,23.972 60.764,23.485 v1(60.764,23.467)
  Bottom Layer w0.254: v1(60.764,23.467) 60.764,17.994 R47.2@60.581,17.812 R43.2@62.5,17.812
EXP_SPI1_CS: R52.1 R155.2 U12.28 | length 10.6
  Top Layer w0.254: U12.28@43,25.728 43,21.857 v1(44.092,20.764)
  Bottom Layer w0.254: R155.2@41.397,17.812 R52.1@43.315,17.812 ; R52.1@43.365,17.812 44.092,18.539 v1(44.092,20.764)
EXP_SPI1_MISO: R53.2 U12.30 | length 9.3
  Top Layer w0.254: U12.30@44,25.728 44,22.908 v1(46.144,20.764)
  Bottom Layer w0.254: v1(46.144,20.764) 46.144,18.711 46.745,18.11 46.758,18.11 47.056,17.812 R53.2@47.152,17.812
EXP_SPI1_MOSI: R40.2 R51.2 U12.31 | length 11.7
  Top Layer w0.254: U12.31@44.5,25.728 44.5,23.434 v1(47.17,20.764)
  Bottom Layer w0.254: v1(47.17,20.764) 47.17,19.713 48.775,18.107 48.775,18.103 49.067,17.812 R51.2@49.071,17.812 R40.2@50.989,17.812
EXP_SPI1_SCK: R50.1 U12.29 | length 8.6
  Top Layer w0.254: U12.29@43.5,25.728 43.5,22.382 v1(45.118,20.764)
  Bottom Layer w0.254: v1(45.118,20.764) 45.146,20.736 45.146,17.899 R50.1@45.234,17.812
EXP_UART7_RX: R48.1 U12.37 | length 11.2
  Top Layer w0.254: U12.37@47.5,25.728 47.5,21.46 v1(48.196,20.764)
  Bottom Layer w0.254: v1(48.196,20.764) 49.842,19.118 51.552,19.118 52.857,17.812 R48.1@52.907,17.812
EXP_UART7_TX: R49.2 U12.38 | length 12.3
  Top Layer w0.254: U12.38@48,25.728 48,21.986 v1(49.222,20.764)
  Bottom Layer w0.254: v1(49.222,20.764) 50.273,19.713 51.687,19.713 52.825,18.574 54.014,18.574 54.776,17.812 R49.2@54.826,17.812
FRAM_CS: R141.1 U12.88 | length 13.1
  Top Layer w0.254: U12.88@48,41.172 v1@48,43.323
  Bottom Layer w0.254: R141.1@37.744,41.657 37.794,41.657 39.476,43.338 v1(48.015,43.338)
FRAM_SPI6_MISO: R144.1 U12.90 | length 21.6
  Top Layer w0.254: U12.90@47.008,41.18 47.008,43.888 47.007,43.889 47.007,44.477 47.01,44.48 47.01,45.068 47.008,45.069 v1(47.008,45.618)
  Bottom Layer w0.254: R144.1@31.492,41.657 31.542,41.657 35.503,45.618 v1(47.008,45.618)
FRAM_SPI6_MOSI: R143.1 U12.91 | length 17.9
  Top Layer w0.254: U12.91@46.5,41.172 v1@46.5,44.853
  Bottom Layer w0.254: R143.1@33.576,41.657 33.626,41.657 36.828,44.858 v1(46.505,44.858)
FRAM_SPI6_SCK: R142.1 U12.89 | length 15.8
  Top Layer w0.254: U12.89@47.5,41.172 v1@47.5,44.087
  Bottom Layer w0.254: R142.1@35.66,41.657 35.71,41.657 38.152,44.098 v1(47.512,44.098)